# Altium PCB PowerSupply-v0.0.PcbDoc
Units mil, origin at the board's own origin, x right, y up, seen from the top; angles counter-clockwise.
Board outline 3675 x 2480 mil, 2 copper layers (Top Layer, Bottom Layer); 47 components, 25 nets, 104 pads, 5 vias.
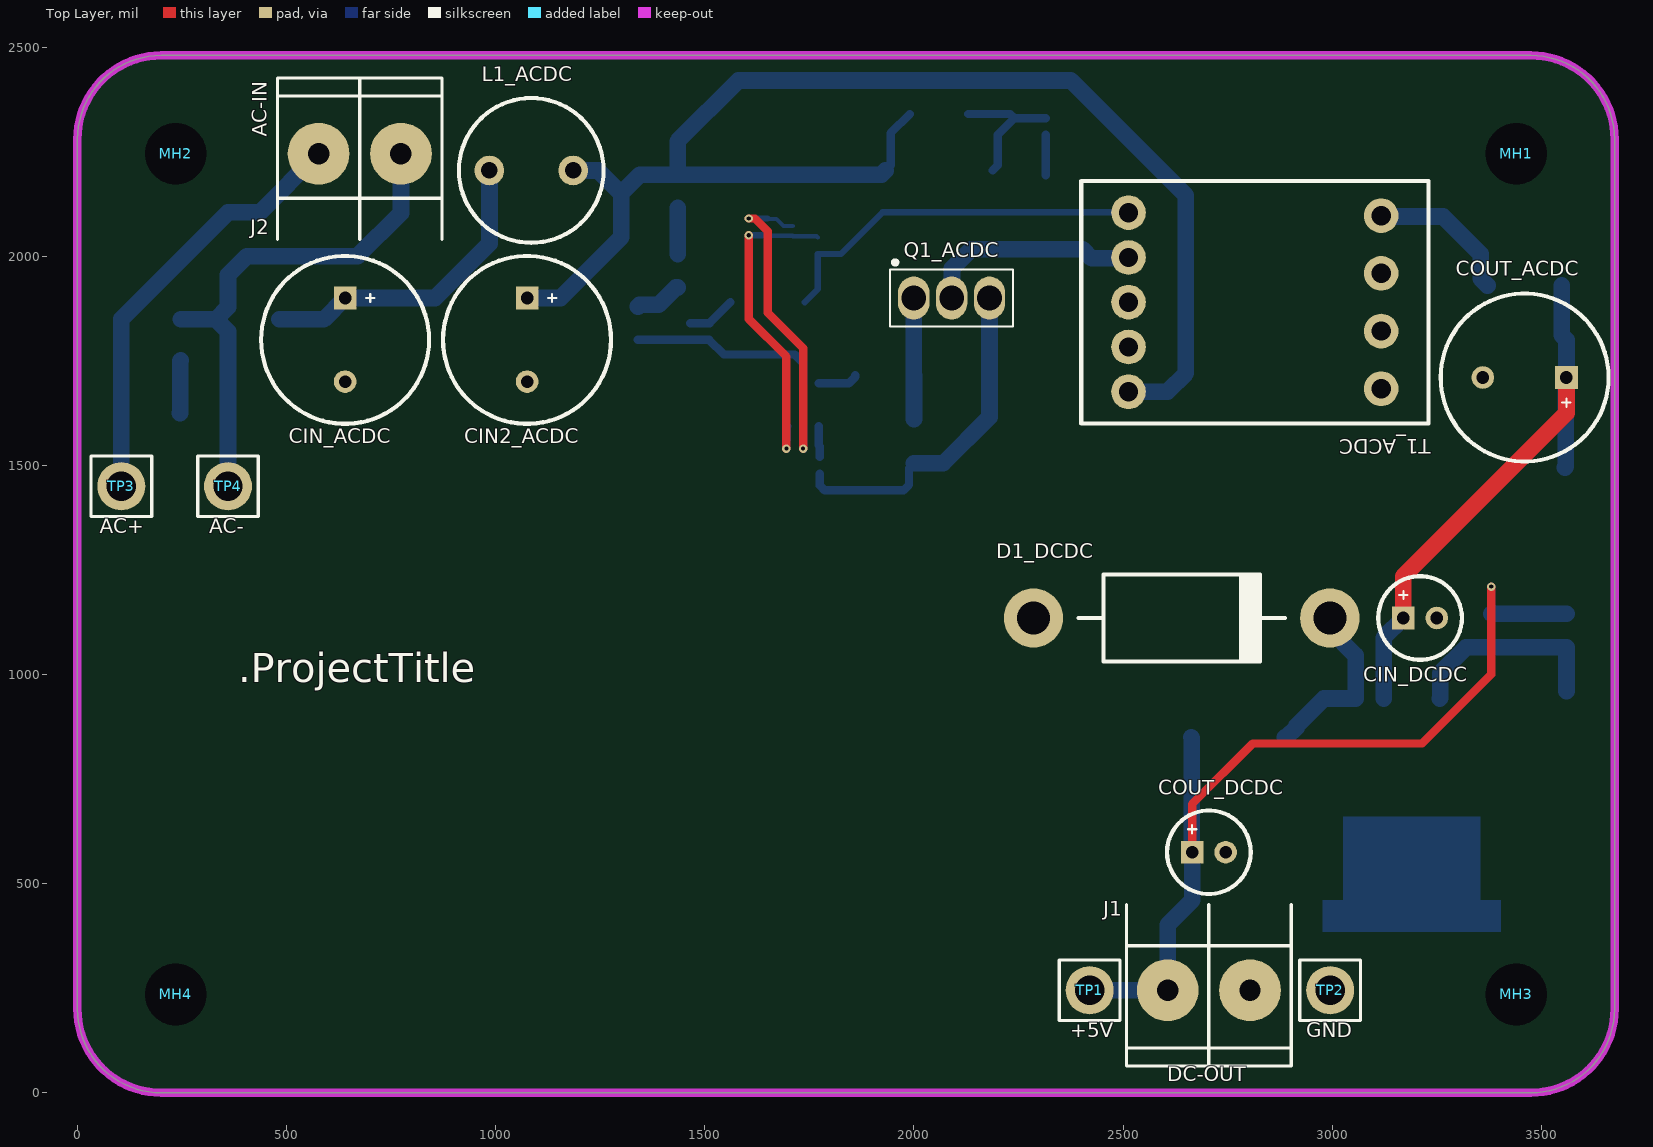
[diagram p0: Top Layer view]
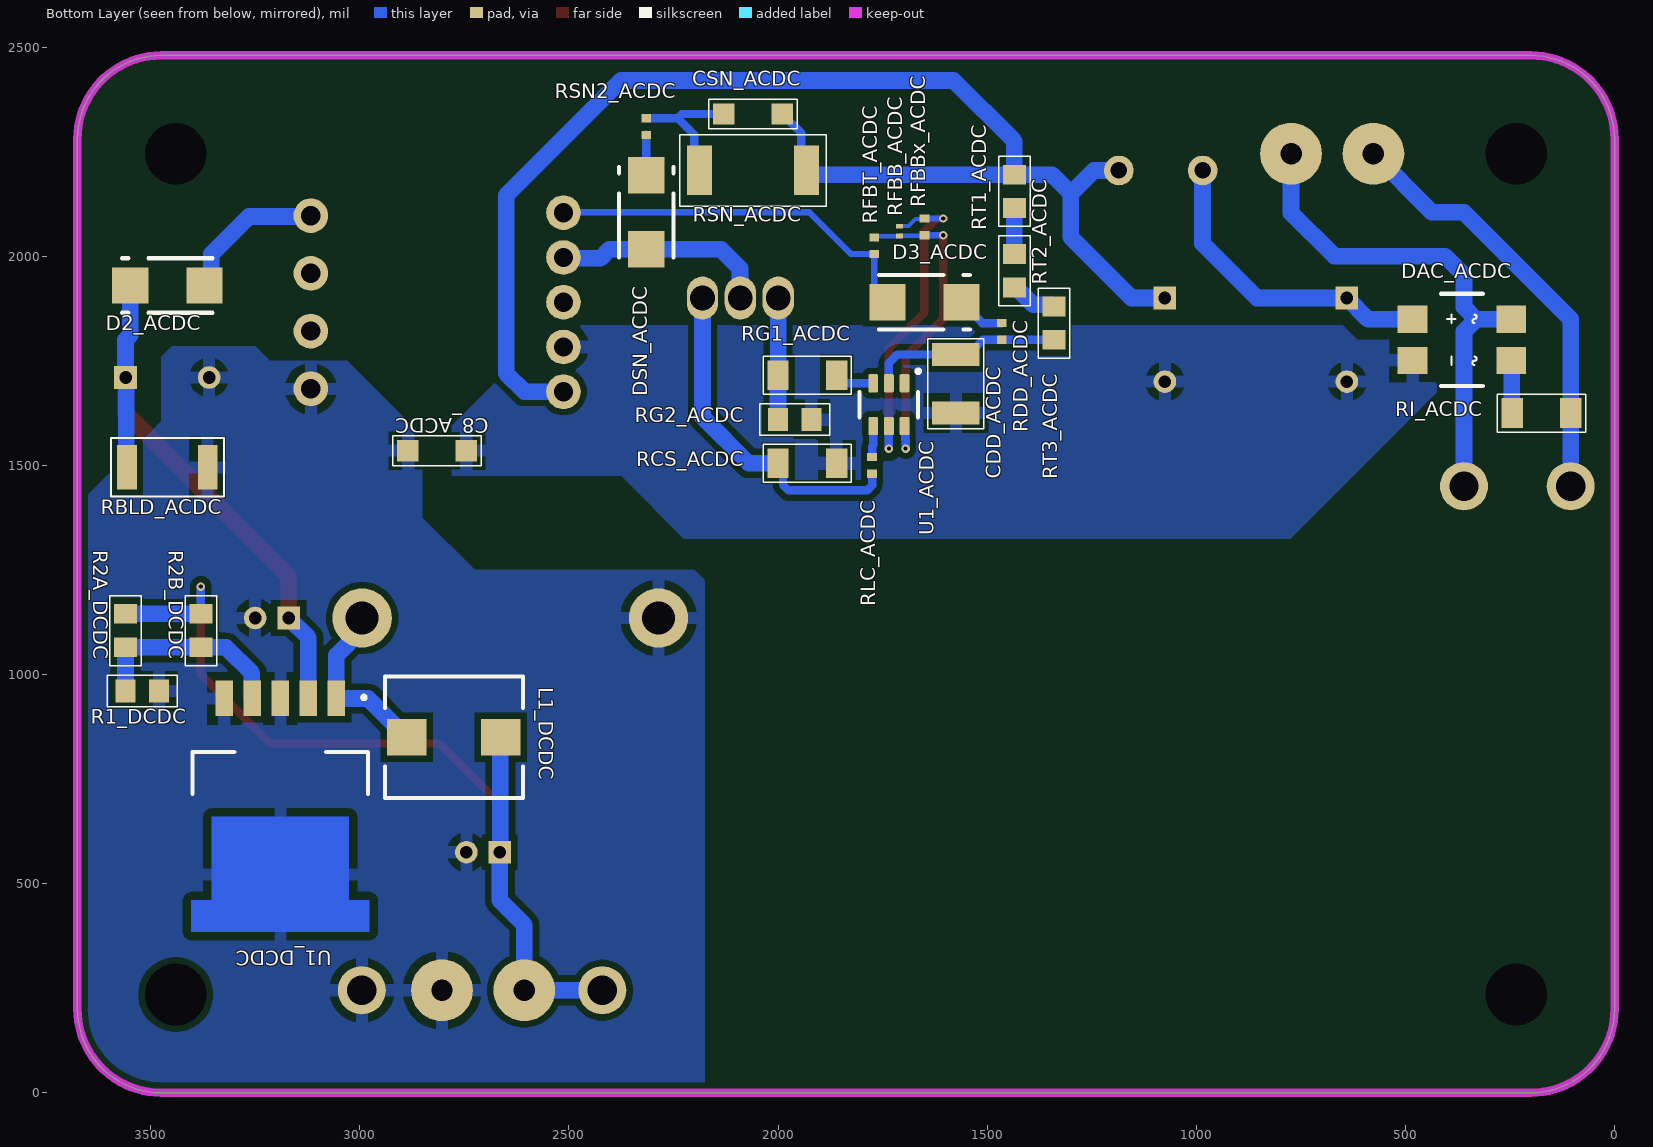
[diagram p1: Bottom Layer view, seen from below]
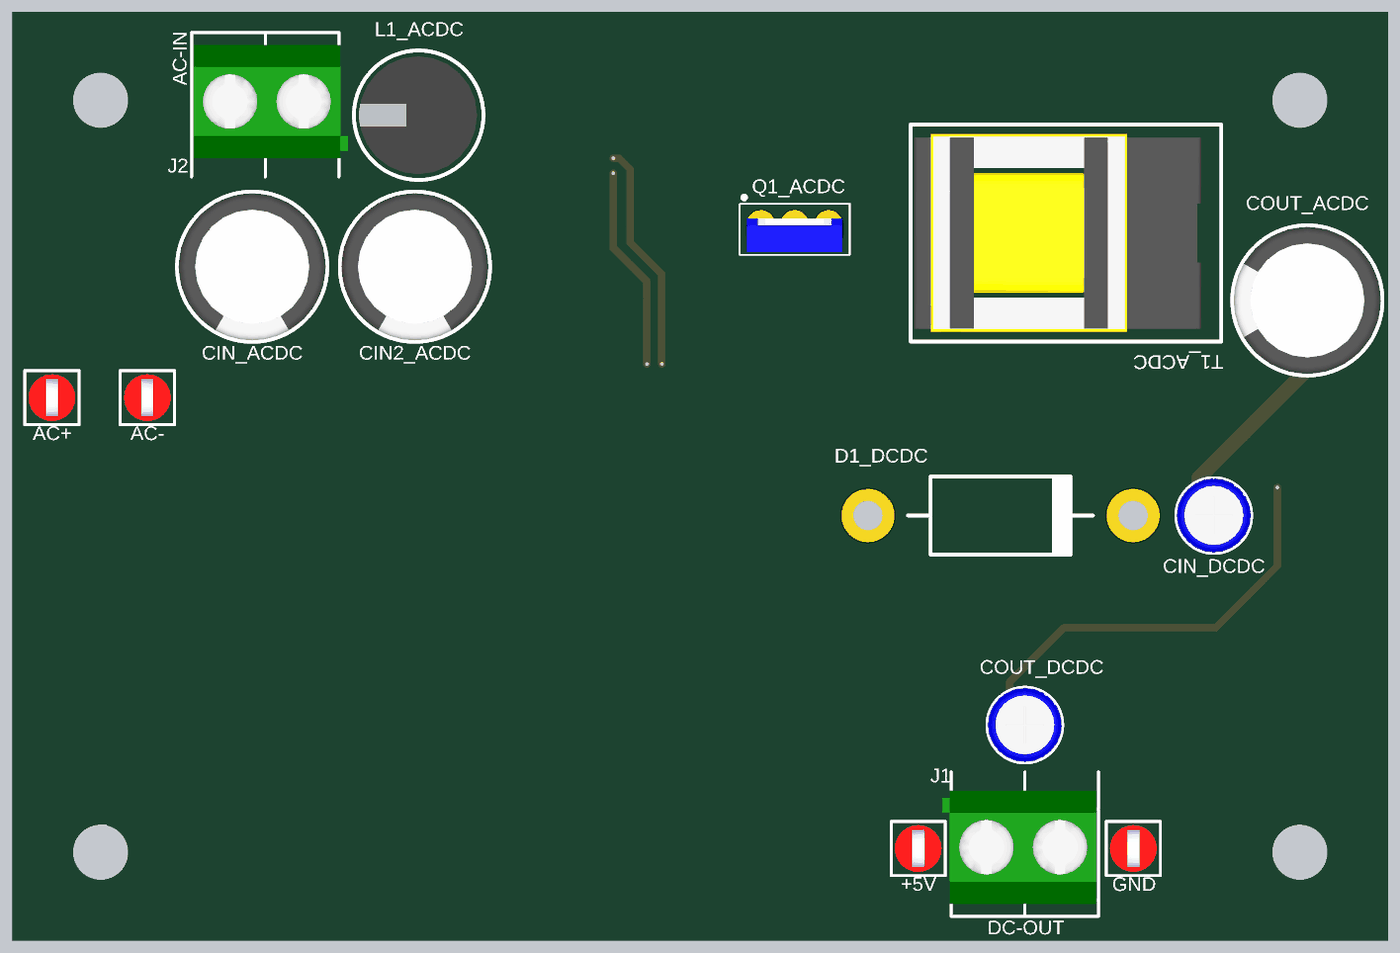
[diagram p2: 3D render of the assembled board from above, using the file's embedded part models]
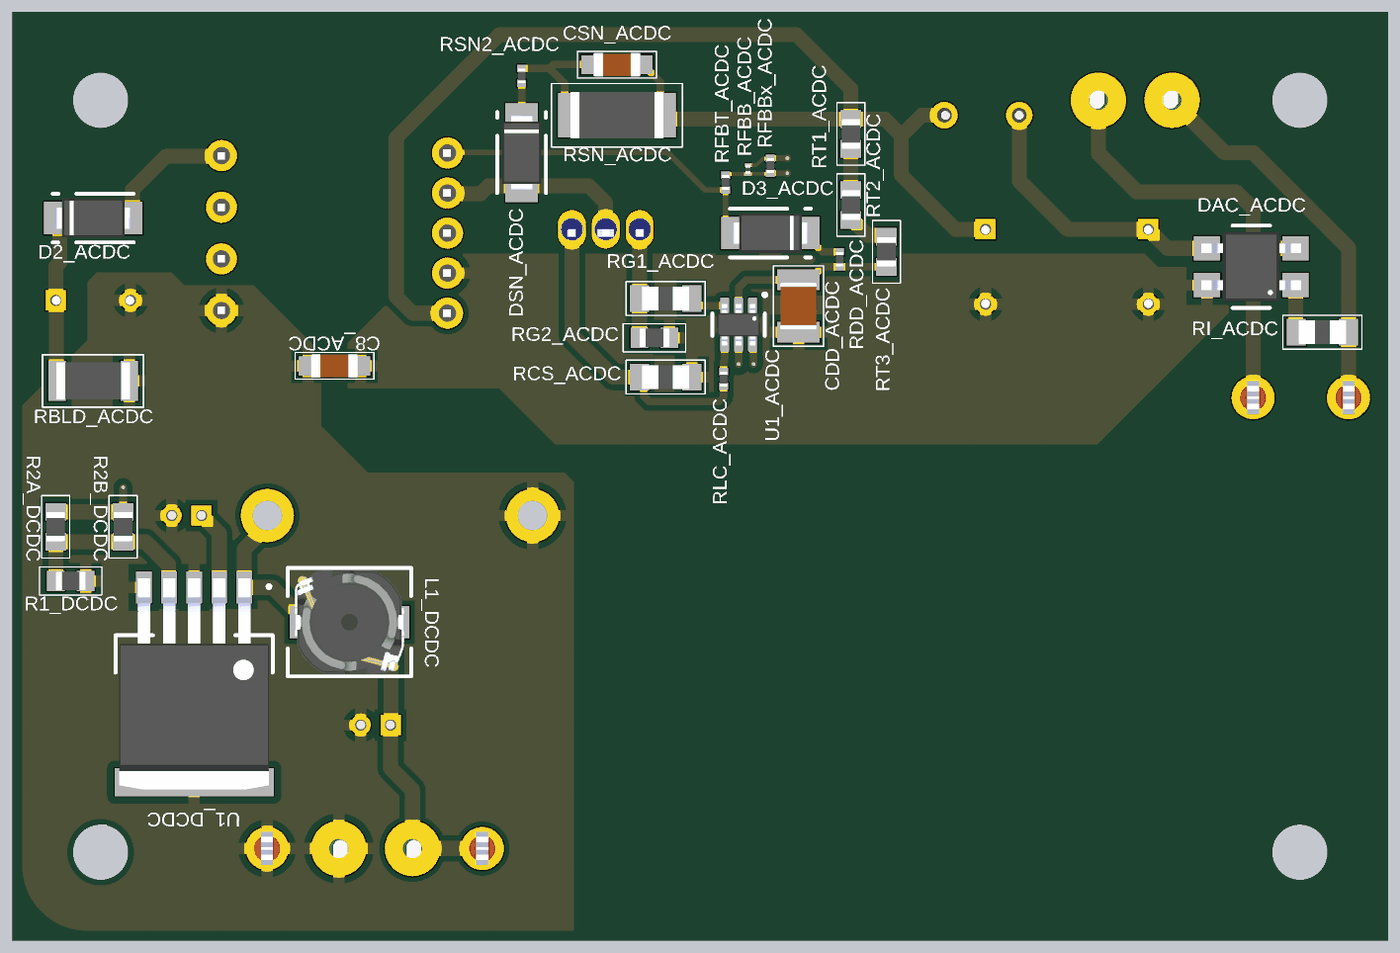
[diagram p3: 3D render of the assembled board from below, using the file's embedded part models]

## Layer stack, top to bottom
Top Solder: solder mask 0.4, Solder Resist, Dk 3.5
Top Layer: signal copper 1.4
Dielectric 1: dielectric 12.6, FR-4, Dk 4.8
Bottom Layer: signal copper 1.4
Bottom Solder: solder mask 0.4, Solder Resist, Dk 3.5

## Board outline
0,200 0,2280 cw(c200,2280) 200,2480 3475,2480 cw(c3475,2280) 3675,2280 3675,200 cw(c3475,200) 3475,0 200,0 cw(c200,200)

## Design rules (kind name [scope] priority, off if disabled: settings)
Clearance Poly [InPolygon] p1: gap=15 ignorepadtopadclearanceinfootprint=FALSE
Clearance [All] p2: gap=7.87 ignorepadtopadclearanceinfootprint=FALSE except(3.5: Arc-Arc Arc-Track Arc-SMDPad Track-Track Track-SMDPad SMDPad-SMDPad; 5: Arc-Via Track-Via SMDPad-Via THPad-Via Via-Via; 10: Arc-Text Track-Text SMDPad-Text THPad-Text Via-Text Fill-Text Poly-Text Region-Text Text-Text)
MinimumSolderMaskSliver [All] p1: minsoldermaskwidth=3.94
PolygonConnect [All] p1: connectstyle=Relief reliefconductorwidth=30 reliefentries=4 polygonreliefangle="90 Angle" airgapwidth=20
RoomDefinition DCDC [InComponentClass('DCDC')] p1: confinementstyle=ConfineIn formatcopy=TRUE lockcomponents=FALSE outline 3685,1360 2190,1360 2190,305 3685,305
RoomDefinition ACDC [InComponentClass('ACDC')] p2: confinementstyle=ConfineIn formatcopy=TRUE lockcomponents=FALSE outline 10,1160 3685,1160 3685,2585 10,2585
RoutingVias [All] p1: holewidth=19.68 width=39.37 viastyle="Through Hole" minholewidth=7.87 minwidth=17.72 maxholewidth=39.37 maxwidth=78.74
SilkToSilkClearance [All] p1: silktosilkclearance=3.94
SilkToSolderMaskClearance [IsPad] p1: minsilkscreentomaskgap=3.94 clearancetoexposedcopper=TRUE
SolderMaskExpansion [All] p1: expansion=4 istentingtop=FALSE
Width [All] p1: maxlimit=50 minlimit=10 preferedwidth=10
27 further rules are at their usual default settings.

## Classes and differential pairs
component class MountHole: MH1 MH2 MH3 MH4
component class PowerSupply_top: J1 J2 MH1 MH2 MH3 MH4 TP1 TP2 TP3 TP4
component class DCDC: CIN_DCDC COUT_DCDC D1_DCDC L1_DCDC R1_DCDC R2A_DCDC R2B_DCDC U1_DCDC
component class ACDC: C8_ACDC CDD_ACDC CIN2_ACDC CIN_ACDC COUT_ACDC CSN_ACDC D2_ACDC D3_ACDC DAC_ACDC DSN_ACDC L1_ACDC Q1_ACDC RBLD_ACDC RCS_ACDC RDD_ACDC RFBB_ACDC RFBBx_ACDC RFBT_ACDC RG1_ACDC RG2_ACDC RI_ACDC RLC_ACDC RSN2_ACDC RSN_ACDC RT1_ACDC RT2_ACDC RT3_ACDC T1_ACDC U1_ACDC

## Components (designator, comment, footprint, x,y, rotation, side; value= is the part's Value field where it differs from the comment)
C8_ACDC "100pF/500V" 1206-CAP-TDK 2815,1535 r0 bottom (schematic designator C8)
CDD_ACDC "10uF/63V" 1210-CAP-TDK 1575,1695 r90 bottom (schematic designator CDD)
CIN2_ACDC "10uF/400V" CAP200RP 1075,1800 r270 top (schematic designator CIN2)
CIN_ACDC "10uF/400V" CAP200RP 640,1800 r270 top (schematic designator CIN)
CIN_DCDC "100uF/16V" CAP100RP 3210,1135 r0 top (schematic designator CIN)
COUT_ACDC "470uF/25V" CAP200RP 3460,1710 r180 top (schematic designator COUT)
COUT_DCDC "220uF/16V" CAP100RP 2705,575 r0 top (schematic designator COUT)
CSN_ACDC "10nF/500V" 1206-CAP-TDK 2060,2340 r0 bottom (schematic designator CSN)
D1_DCDC "1N5822" DO201-AD 2640,1135 r0 top (schematic designator D1)
D2_ACDC "SK220A" DO-214AC-SMA 3460,1930 r0 bottom (schematic designator D2)
D3_ACDC "SK220A" DO-214AC-SMA 1650,1890 r180 bottom (schematic designator D3)
DAC_ACDC "HD06-T" "HD06 - MiniDIP" 365,1800 r90 bottom (schematic designator DAC)
DSN_ACDC "US1M-E3/5AT" DO-214AC-SMA 2315,2105 r90 bottom (schematic designator DSN)
J1 "DC-OUT" BORNERA2 2705,245 r90 top
J2 "AC-IN" BORNERA2 675,2245 r270 top
L1_ACDC "RL187-471J-RC" RL187-471J-RC 1085,2205 r0 top (schematic designator L1)
L1_DCDC "47uH" CLF7045NIT-470M-D 2775,850 r180 bottom (schematic designator L1)
MH1 "MH-3.75MM" MH-3.75mm-NP 3440,2245 r0 top locked
MH2 "MH-3.75MM" MH-3.75mm-NP 235,2245 r0 top locked
MH3 "MH-3.75MM" MH-3.75mm-NP 3440,235 r0 top locked
MH4 "MH-3.75MM" MH-3.75mm-NP 235,235 r0 top locked
Q1_ACDC "STD4NK80Z-1" STD4NK80Z-1 2090,1900 r0 top (schematic designator Q1)
R1_DCDC "1K" 0805-RES-PANASONIC 3520,960 r0 bottom (schematic designator R1)
R2A_DCDC "3K3" 0805-RES-PANASONIC 3560,1105 r90 bottom (schematic designator R2A)
R2B_DCDC "39K" 0805-RES-PANASONIC 3380,1105 r90 bottom (schematic designator R2B)
RBLD_ACDC "120R" 2010-RES-PANASONIC 3460,1495 r0 bottom (schematic designator RBLD)
RCS_ACDC "1R6" 1206-RES-PANASONIC 1930,1505 r0 bottom (schematic designator RCS)
RDD_ACDC "22R1" 0402-RES-PANASONIC 1465,1820 r270 bottom (schematic designator RDD)
RFBB_ACDC "28K7" 0201-RES-PANASONIC 1710,2060 r270 bottom (schematic designator RFBB)
RFBBx_ACDC "TBD" 0402-RES-PANASONIC 1650,2070 r270 bottom (schematic designator RFBBx)
RFBT_ACDC "107K" 0402-RES-PANASONIC 1770,2025 r270 bottom (schematic designator RFBT)
RG1_ACDC "10R" 1206-RES-PANASONIC 1930,1715 r0 bottom (schematic designator RG1)
RG2_ACDC "10K" 0805-RES-PANASONIC 1960,1610 r0 bottom (schematic designator RG2)
RI_ACDC "28R7" 1206-RES-PANASONIC 175,1625 r180 bottom (schematic designator RI)
RLC_ACDC "3K57" 0402-RES-PANASONIC 1775,1500 r270 bottom (schematic designator RLC)
RSN2_ACDC "464R" 0402-RES-PANASONIC 2315,2310 r270 bottom (schematic designator RSN2)
RSN_ACDC "39K" 2512-RES-PANASONIC 2060,2205 r0 bottom (schematic designator RSN)
RT1_ACDC "4.99M" 0805-RES-PANASONIC 1435,2155 r90 bottom (schematic designator RT1)
RT2_ACDC "4.99M" 0805-RES-PANASONIC 1435,1965 r90 bottom (schematic designator RT2)
RT3_ACDC "4.99M" 0805-RES-PANASONIC 1340,1840 r90 bottom (schematic designator RT3)
T1_ACDC "750312723" 750312723 2815,1890 r0 top (schematic designator T1)
TP1 "+5V" 534-5280 2420,245 r180 top
TP2 "GND" 534-5280 2995,245 r180 top
TP3 "AC+" 534-5280 105,1450 r0 top
TP4 "AC-" 534-5280 360,1450 r0 top
U1_ACDC "UCC28703DBV" TI-SOT-23-DBV0006A 1735,1645 r270 bottom (schematic designator U1)
U1_DCDC "LM2595S-ADJ" TI-TO-263-KTT 3190,605 r0 bottom (schematic designator U1)

## Footprints (in the part's own frame and the unit in brackets; to place one, negate y for a bottom-side part, rotate by r counter-clockwise, add the part's x,y. Pads: shape width x height; smd on the part's side, far side on the other; paste and mask are expansions set on the pad)
0201-RES-PANASONIC [mm]
  rect 0.28x0.43 smd mask+0.05: 1(-0.3,0) 2(0.3,0)
  body extent -0.32,-0.17 0.32,0.17, height 0.25
0402-RES-PANASONIC [mm]
  rect 0.5x0.6 smd: 1(-0.508,0) 2(0.508,0)
  body extent -0.5,-0.25 0.5,0.25, height 0.35
534-5280 [mil]
  round 115 hole 70: 1(0,0)
  silkscreen extent -73,-73 73,73, body extent -63,-62 63,62, height 320
0805-RES-PANASONIC [mm]
  rect 1.2x1.4 smd: 1(-1.016,0) 2(1.016,0)
  silkscreen extent -2.12,-0.95 2.12,0.95, body extent -1,-0.63 1,0.63, height 0.6
1206-CAP-TDK [mm]
  rect 1.3x1.3 smd: 1(-1.778,0) 2(1.778,0)
  silkscreen extent -2.68,-0.9 2.68,0.9, body extent -1.6,-0.8 1.6,0.8, height 1.8
1206-RES-PANASONIC [mm]
  rect 1.3x1.8 smd: 1(-1.778,0) 2(1.778,0)
  silkscreen extent -2.68,-1.15 2.68,1.15, body extent -1.6,-0.8 1.6,0.8, height 0.65
1210-CAP-TDK [mm]
  rect 1.4x2.9 smd: 1(-1.778,0) 2(1.778,0)
  silkscreen extent -2.73,-1.7 2.73,1.7, body extent -1.6,-1.25 1.6,1.25, height 2.7
2010-RES-PANASONIC [mm]
  rect 1.2x2.7 smd: 1(-2.45,0) 2(2.45,0)
  silkscreen extent -3.43,-1.78 3.43,1.78, body extent -2.5,-1.25 2.5,1.25, height 0.7
2512-RES-PANASONIC [mm]
  rect 1.5x3 smd: 1(-3.25,0) 2(3.25,0)
  silkscreen extent -4.44,-2.16 4.44,2.16, body extent -3.15,-1.58 3.15,1.58, height 0.7
750312723 [mil]
  round 82.91 hole 46.06: 1(-302,214) 2(-302,107) 3(-302,0) 4(-302,-107) 5(-302,-214) 6(302,-207) 7(302,-69) 8(302,69) 9(302,207)
  silkscreen extent -415,-290 415,290, body extent -406,-264 361,264, height 370
BORNERA2 [mm] "Bornera con Tornillos 5mm separación"
  round 3.75 hole 1.3: 1(0,2.5) 2(0,-2.5)
  silkscreen extent -4.6,-5 5.2,5, body extent -3.76,-4.89 3.94,5.61, height 10
CAP100RP [mil] "Body diameter 5mm"
  rect 54x54 hole 30: 1(-40,0)
  round 54 hole 30: 2(40,0)
  silkscreen extent -100,-100 100,100, body extent -99,-99 99,100, height 454
CAP200RP [mil] "Body Diameter 10.33mm"
  rect 54x54 hole 30: 1(-100,0)
  round 54 hole 30: 2(100,0)
  silkscreen extent -201,-201 201,201, body extent -197,-197 197,197, height 787
CLF7045NIT-470M-D [mm] "NonStandard Inductor"
  rect 2.4x2.2 smd: 1(-2.85,0) 2(2.85,0)
  silkscreen extent -4.19,-3.68 4.19,3.68, body extent -3.7,-3.5 3.7,3.5, height 4.8
DO201-AD [mm]
  round 3.6 hole 2: 1(-9,0) 2(9,0)
  silkscreen extent -6.27,-2.65 6.27,2.65
DO-214AC-SMA [mm]
  rect 2.2x2.2 smd: 1(-2.25,0) 2(2.25,0)
  silkscreen extent -2.75,-1.65 2.75,1.65, body extent -2.55,-1.33 2.55,1.33, height 2.3
"HD06 - MiniDIP" [mm]
  rect 1.65x1.8 smd: 1(-1.25,-3) 2(1.25,3) 3(1.25,-3) 4(-1.25,3)
  silkscreen extent -2.79,-1.27 2.79,1.27, body extent -2.35,-3.4 2.35,3.4, height 3
MH-3.75mm-NP [mm]
  round 3 hole 3.75 unplated: 1(0,0)
RL187-471J-RC [mm]
  round 1.8 hole 1: 1(-2.54,0) 2(2.54,0)
  silkscreen extent -4.39,-4.39 4.39,4.39, body extent -4.05,-4 3.96,4, height 11.22
STD4NK80Z-1 [mm]
  oval 1.9x2.6 hole 1.5 mask+0.07: 1(-2.3,0) 2(0,0) 3(2.3,0)
  silkscreen extent -3.73,-1.73 3.73,2.29, body extent -3.25,-1.55 3.25,0.75, height 8.3
TI-SOT-23-DBV0006A [mm]
  rrect25% 1.1x0.6 smd mask+0.07: 1(-1.3,0.95) 2(-1.3,0) 3(-1.3,-0.95) 4(1.3,-0.95) 5(1.3,0) 6(1.3,0.95)
  silkscreen extent -2.13,-1.78 0.76,1.88, body extent -1.4,-1.45 1.4,1.45, height 1.45
TI-TO-263-KTT [mil]
  rect 42x85 smd mask+2.76: 1(-134,-337.75) 2(-67,-337.75) 3(0,-337.75) 4(67,-337.75) 5(134,-337.75)
  round 1 smd mask+2.76: 6(0,82.75)
  Top Layer region: -212.5,145.25 -164,145.25 -164,-54.75 164,-54.75 164,145.25 212.5,145.25 212.5,220.25 -212.5,220.25
  silkscreen extent -210,-344 210,-110, body extent -200,-362 200,202, height 183

## Part data
C8_ACDC CDD_ACDC CSN_ACDC: library part CAP-SMD
CIN2_ACDC CIN_ACDC CIN_DCDC COUT_ACDC COUT_DCDC: library part CAPPOL-THT
D1_DCDC D2_ACDC D3_ACDC: library part "DIODE SCHOTTKY", "Diode Schottky"
DAC_ACDC: "Bridge Rectifier Single Phase Standard 600 V Surface Mount 4-MiniDIP"
DSN_ACDC: library part "DIODE RECTIFIER", "Diode Rectifier"
J1 J2: library part "BORNERA 2"
L1_DCDC: library part IND-SMD
R1_DCDC R2A_DCDC R2B_DCDC RBLD_ACDC RCS_ACDC RDD_ACDC RFBB_ACDC RFBBx_ACDC RFBT_ACDC RG1_ACDC RG2_ACDC RI_ACDC RLC_ACDC RSN2_ACDC RSN_ACDC RT1_ACDC RT2_ACDC RT3_ACDC: library part RES-SMD
T1_ACDC: "Flyback Converters For For DC/DC Converters SMPS Transformer 4500Vrms Isolation 130kHz Through Hole"
TP1 TP2 TP3 TP4: library part TP-CLAW
MH1 MH2 MH3 MH4: ClassName=MountHole

## Via types
v1: diameter 20, hole 10, Top Layer to Bottom Layer, tented both sides, 5 vias

## Nets (pads, with @x,y where several pads share a name; then routed paths per layer and width w, separated by ;. In a path a pad name is that pad's centre, name@x,y a point inside that pad or via, vN(x,y) a via of type N, cw(c..) or ccw(c..) an arc to the next point about the centre after c; other vN are vias at no path point)
GND: C8_ACDC.2 CIN_DCDC.2 COUT_ACDC.2 COUT_DCDC.2 D1_DCDC.1 J1.2 R1_DCDC.1 RBLD_ACDC.1 T1_ACDC.6 TP2.1 U1_DCDC.3 U1_DCDC.5 U1_DCDC.6
NetCDD_ACDC_2: CDD_ACDC.2 RDD_ACDC.2 RT3_ACDC.1 U1_ACDC.2 | length 466.6
  Bottom Layer w20: RT3_ACDC.1 RDD_ACDC.2 1510.47,1800 1545.47,1765 CDD_ACDC.2 1715,1765 1735,1745 U1_ACDC.2
NetCIN2_ACDC_1: CIN2_ACDC.1 CSN_ACDC.1 L1_ACDC.2 RSN_ACDC.1 RT1_ACDC.2 T1_ACDC.5 | length 3391.1
  Bottom Layer w20: RSN_ACDC.1 1944.06,2217.01 1944.06,2294.06 CSN_ACDC.1
  Bottom Layer w40: CIN2_ACDC.1 1155,1900 1300,2045 1300,2150 ; L1_ACDC.2 1245,2205 1300,2150 ; RSN_ACDC.1 1932.05,2204.53 1922.52,2195 RT1_ACDC.2 ; T1_ACDC.5 2606,1676 2650,1720 2650,2145 2375,2420 1580,2420 1435,2275 RT1_ACDC.2 ; 1300,2150 1345,2195 RT1_ACDC.2
NetCIN_ACDC_1: CIN_ACDC.1 DAC_ACDC.2 L1_ACDC.1 | length 751.8
  Bottom Layer w40: DAC_ACDC.2 589.21,1849.21 CIN_ACDC.1 855,1900 985,2030 L1_ACDC.1
NetCSN_ACDC_2: CSN_ACDC.2 RSN2_ACDC.1 RSN_ACDC.2 | length 335.7
  Bottom Layer w20: CSN_ACDC.2 2230,2340 2240,2330 ; RSN_ACDC.2 2200,2217.05 2200,2290 2240,2330 ; RSN2_ACDC.1 2240,2330
NetD1_DCDC_2: D1_DCDC.2 L1_DCDC.1 U1_DCDC.1 | length 427.3
  Bottom Layer w40: L1_DCDC.1 2891.14,850 2914.45,873.31 2914.45,877.24 2979.95,942.75 U1_DCDC.1 3056,1045.8 2994.33,1107.47 D1_DCDC.2
NetD2_ACDC_1: D2_ACDC.1 T1_ACDC.9 | length 357.9
  Bottom Layer w40: T1_ACDC.9 3119,2095 3265,2095 3354.98,2005.02 3354.98,1946.44 D2_ACDC.1
NetD3_ACDC_1: D3_ACDC.1 RFBT_ACDC.2 T1_ACDC.1 | length 912.8
  Bottom Layer w15: D3_ACDC.1 1770,1921.42 RFBT_ACDC.2 1825,2005 1925,2105 2512,2105 T1_ACDC.1
NetD3_ACDC_2: D3_ACDC.2 RDD_ACDC.1 | length 117.1
  Bottom Layer w20: RDD_ACDC.1 1511.42,1840 D3_ACDC.2
NetDAC_ACDC_1: DAC_ACDC.1 RI_ACDC.1 | length 126.6
  Bottom Layer w40: RI_ACDC.1 245.94,1625.94 245.94,1749.84 DAC_ACDC.1
NetDSN_ACDC_1: DSN_ACDC.1 Q1_ACDC.2 T1_ACDC.2 | length 521.9
  Bottom Layer w40: Q1_ACDC.2 2090.76,1900.76 2090.76,1970.76 2136.42,2016.42 DSN_ACDC.1 2403.58,2016.42 2425,1995 2511,1995 T1_ACDC.2
NetDSN_ACDC_2: DSN_ACDC.2 RSN2_ACDC.2 | length 96.4
  Bottom Layer w20: DSN_ACDC.2 RSN2_ACDC.2
NetJ2_1: DAC_ACDC.3 J2.1 TP4.1 | length 1229.6
  Bottom Layer w40: DAC_ACDC.3 330.79,1849.21 ; TP4.1 360,1820 330.79,1849.21 ; J2.1 773.43,2103.43 670,2000 405,2000 360,1955 360,1878.43 330.79,1849.21
NetJ2_2: J2.2 RI_ACDC.2 TP3.1 | length 1035.2
  Bottom Layer w40: TP3.1 RI_ACDC.2 105,1850 360,2105 436.57,2105 J2.2
NetQ1_ACDC_1: Q1_ACDC.1 RG1_ACDC.2 RG2_ACDC.2 | length 290.2
  Bottom Layer w40: Q1_ACDC.1 1999.72,1899.72 1999.72,1715.28 RG1_ACDC.2 RG2_ACDC.2
NetQ1_ACDC_3: Q1_ACDC.3 RCS_ACDC.2 RLC_ACDC.2 | length 819.3
  Bottom Layer w20: RLC_ACDC.2 1775,1451.72 1786.72,1440 1975,1440 1988.27,1453.28 1988.27,1493.28 RCS_ACDC.2
  Bottom Layer w40: RCS_ACDC.2 2070,1505 2180.55,1615.55 Q1_ACDC.3
NetR1_DCDC_2: R1_DCDC.2 R2A_DCDC.1 R2B_DCDC.1 U1_DCDC.4 | length 493.3
  Bottom Layer w40: U1_DCDC.4 3258,943.75 3258,1003 3320,1065 R2A_DCDC.1 R1_DCDC.2
NetRFBB_ACDC_2: RFBB_ACDC.2 RFBBx_ACDC.2 RFBT_ACDC.1 U1_ACDC.6 | length 769.2
  Top Layer w20: v1(1605,2050) 1605,1850 1695,1760 v1(1695,1540)
  Bottom Layer w10: RFBBx_ACDC.2 1651.3,2048.7 1709.49,2048.7 RFBB_ACDC.2 1710.51,2047.68 1767.32,2047.68 RFBT_ACDC.1
  Bottom Layer w15: v1(1605,2050) RFBBx_ACDC.2
  Bottom Layer w20: v1(1695,1540) 1695,1560 1695.79,1560.79 1695.79,1592.01 U1_ACDC.6
NetRG1_ACDC_1: RG1_ACDC.1 U1_ACDC.3 | length 97.3
  Bottom Layer w20: U1_ACDC.3 1844.41,1696.18 1860,1711.77 RG1_ACDC.1
NetRLC_ACDC_1: RLC_ACDC.1 U1_ACDC.4 | length 74.9
  Bottom Layer w20: U1_ACDC.4 1772.4,1547.6 1775,1545 RLC_ACDC.1
NetRT1_ACDC_1: RT1_ACDC.1 RT2_ACDC.2 | length 110
  Bottom Layer w40: RT2_ACDC.2 RT1_ACDC.1
NetRT2_ACDC_1: RT2_ACDC.1 RT3_ACDC.2 | length 113.6
  Bottom Layer w40: RT3_ACDC.2 1343.62,1883.62 1389.69,1883.62 1431.06,1925 RT2_ACDC.1
RTN: C8_ACDC.1 CDD_ACDC.1 CIN2_ACDC.2 CIN_ACDC.2 DAC_ACDC.4 RCS_ACDC.1 RFBB_ACDC.1 RFBBx_ACDC.1 RG2_ACDC.1 T1_ACDC.4 U1_ACDC.5 | length 777.6
  Top Layer w20: v1(1605,2090) 1620,2090 1650,2060 1650,1865 1735,1780 v1(1735,1540)
  Bottom Layer w10: RFBBx_ACDC.1@1650.95,2089.05 1670.95,2089.05 1688.19,2071.81 RFBB_ACDC.1
  Bottom Layer w15: v1(1605,2090) RFBBx_ACDC.1
  Bottom Layer w20: v1(1735,1540) U1_ACDC.5
VIN: CIN_DCDC.1 COUT_ACDC.1 D2_ACDC.2 RBLD_ACDC.2 U1_DCDC.2 | length 1389.5
  Top Layer w40: CIN_DCDC.1 3170,1235 3560,1625 COUT_ACDC.1
  Bottom Layer w40: U1_DCDC.2 3123,1088 CIN_DCDC.1 ; D2_ACDC.2 3548.58,1811.42 3560,1800 COUT_ACDC.1 3558.23,1708.23 3558.23,1496.77 RBLD_ACDC.2
VOUT: COUT_DCDC.1 J1.1 L1_DCDC.2 R2A_DCDC.2 R2B_DCDC.2 TP1.1 | length 2230.1
  Top Layer w20: COUT_DCDC.1 2665,690 2810,835 3215,835 3380,1000 v1(3380,1210)
  Bottom Layer w20: R2B_DCDC.2 v1(3380,1210)
  Bottom Layer w40: TP1.1 J1.1 2606.57,401.57 2665,460 COUT_DCDC.1 2663.9,576.1 2663.9,848.9 L1_DCDC.2 ; R2B_DCDC.2 R2A_DCDC.2
pads on no net: MH1.1 MH2.1 MH3.1 MH4.1 T1_ACDC.3 T1_ACDC.7 T1_ACDC.8 U1_ACDC.1

## Polygon pours and split planes (outlines as drawn)
RTN on Bottom Layer "RTN" (solid, remove dead copper, pour order 1): 450,1800 615,1800 650,1835 2540,1835 2780,1595 2780,1475 2375,1475 2225,1325 775,1325 425,1675 425,1775
GND on Bottom Layer "GND" (solid, remove dead copper, pour order 0): 3250,1785 3450,1785 3475,1760 3475,1605 3675,1405 3675,0 2175,0 2175,1225 2200,1250 2725,1250 2850,1375 2850,1570 3030,1750 3215,1750

## Keep-outs
Keep-Out Layer:
  the board outline again, w20

## Silkscreen, mask and mechanical layers (free items; w line width, h text height)
Top Overlay:
  text "AC-IN" at 464.33,2285 h60 r90
  text ".ProjectTitle" at 385,957.55 h120
  text "DC-OUT" at 2605,15.67 h60
Board Outline:
  the board outline again, w1